# EAGLE board LED Driver (EAGLE 8.6.3)
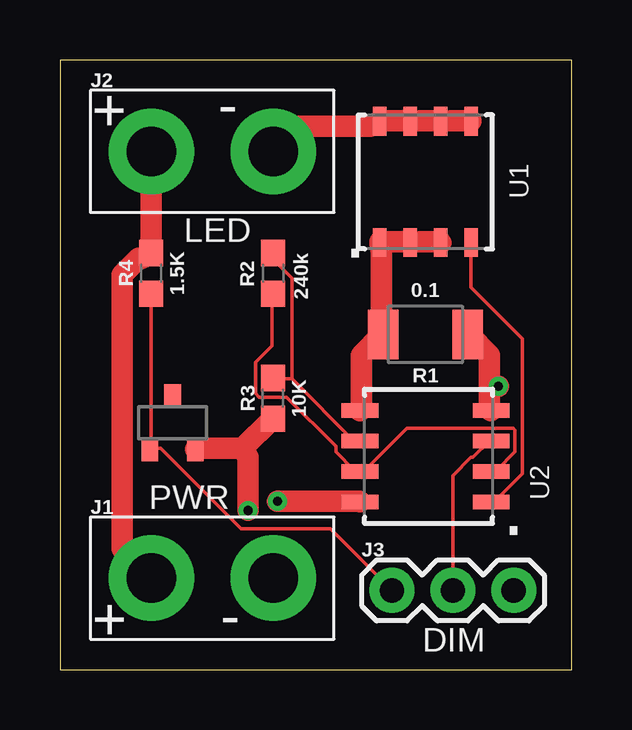
[diagram p0: board, top side]
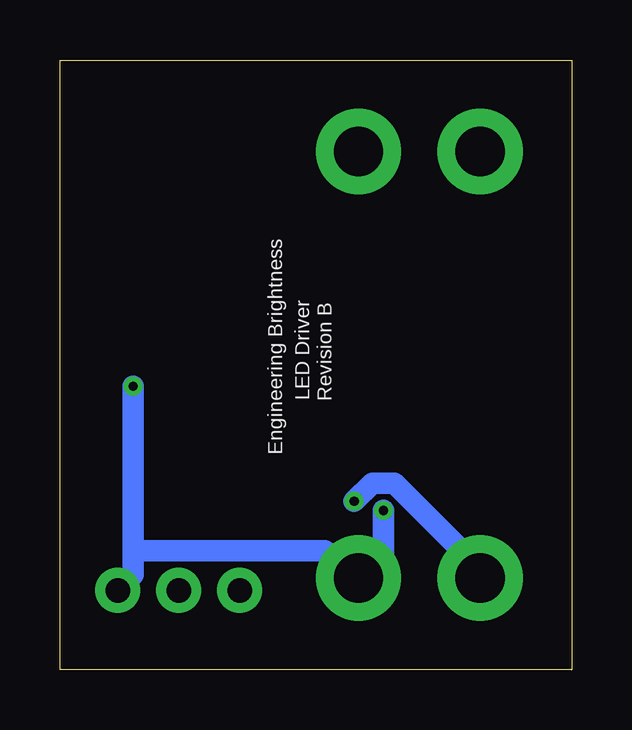
[diagram p1: board, bottom side, seen from below]

Size 21.34 x 25.4 mm. Coordinates in mm from the lower left corner, seen from the top.
Outline: 0,0 21.34,0 21.34,25.4 0,25.4 0,0
Copper layers (1*16): Top 0.035mm / dielectric 1.5mm / Bottom 0.035mm
Design rules "default": minimum track width 6mil, minimum drill 0.35mm, track to track 6mil, track to pad 6mil, pad to pad 6mil, via to via 6mil, smd to smd 6mil, copper to edge 40mil, drill to drill 6mil, minimum pad ring 10mil, minimum via ring 8mil, stop-mask expansion 4mil, vias tented up to drill 0mil, thermal gap 10mil
Net classes: 1 POWER: width 0.889 mm, drill 0.381 mm, clearance 0.203 mm

## Footprints (pad centres in the part's own frame; a part is rotated, then mirrored left to right if it is on the bottom)
DBZ_R-PDSO-G3 = smd 0.7 x 1: 1 -0.95,-1.1; 2 0.95,-1.1; 3 0,1.1
1X02_XTRA_BIG = drill 2.057 pad 3.556: 1 -2.54,0; 2 2.54,0
1X03 = drill 1.016 pad 1.88: 1 0,0; 2 2.54,0; 3 5.08,0
1210 = smd 1.27 x 2.06: 1 -1.755,0; 2 1.755,0
0603 = smd 1.1 x 1: 1 -0.85,0; 2 0.85,0
SO8 = smd 1.194 x 0.559: 1 -2.527,1.905; 2 -2.527,0.635; 3 -2.527,-0.635; 4 -2.527,-1.905; 5 2.527,-1.905; 6 2.527,-0.635; 7 2.527,0.635; 8 2.527,1.905
SOIC8 = smd 0.61 x 1.524: 1 -1.905,-2.731; 2 -0.635,-2.731; 3 0.635,-2.731; 4 1.905,-2.731; 5 1.905,2.731; 6 0.635,2.731; 7 -0.635,2.731; 8 -1.905,2.731

## Placement (x,y rotation side)
IC1  LM4041A12DBZ  [DBZ_R-PDSO-G3]  4.7,10.29 0 top
J1  [1X02_XTRA_BIG]  6.35,3.81 0 top
J2  [1X02_XTRA_BIG]  6.35,21.59 0 top
J3  [1X03]  13.84,3.3 0 top
R1  0.1  [1210]  15.24,13.97 180 top
R2  240k  [0603]  8.89,16.51 270 top
R3  10K  [0603]  8.89,11.3 90 top
R4  1.5K  [0603]  3.81,16.51 90 top
U$1  SI4712DY  [SO8]  15.24,20.32 90 top
U$2  MC33202DR2G  [SOIC8]  15.24,8.89 90 top

## Library data of the parts
IC1 = texas; MPN: LM4041A12IDBZR; OC_FARNELL: 1407949; OC_NEWARK: 58K5875
J1-J3 = SparkFun-Connectors
R1 = SparkFun-Resistors; PROD_ID: RES-12374
R2-R4 = SparkFun-Resistors; PROD_ID: RES-08413
U$1 U$2 = CECFC

## Nets
GND [POWER]: IC1.2 J1.2 J3.3 R1.1 R3.1 U$2.4
N$1: IC1.1 J3.1 R4.1
N$2: J3.2 U$2.3
N$3: U$1.4 U$2.1
N$4 [POWER]: J2.2 U$1.5 U$1.6 U$1.7 U$1.8
N$5 [POWER]: R1.2 U$1.1 U$1.2 U$1.3 U$2.5
N$6: R2.2 U$2.2 U$2.7
N$7: R2.1 R3.2 U$2.6
VCC [POWER]: J1.1 J2.1 R4.2 U$2.8

## Tracks (layer width: path | path; a pad name or v marks a point on that pad's centre or on a via)
GND  (via drill 0.38)
  Top 0.889: 17.91,11.81 17.91,13.11 17.07,13.95 R1.1 | 17.91,11.81 17.91,10.82 U$2.4 | v18.29,11.81 17.91,11.81 | 7.62,9.22 5.71,9.22 IC1.2 | 7.62,9.22 8.84,10.44 R3.1 | v7.85,6.63 7.85,8.84 7.62,9.22
  Bottom 0.889: 18.29,4.95 18.29,3.96 18.9,3.35 J3.3 | 18.29,4.95 v18.29,11.81 | v7.85,6.63 7.85,4.8 8.84,3.81 J1.2 9.3,3.96 10.29,4.95 18.29,4.95
N$1
  Top 0.152: R4.1 3.81,9.22 IC1.1 3.89,9.22 4.19,9.22 7.54,5.87 11.28,5.87 J3.1
N$2
  Top 0.152: J3.2 16.38,8.08 17.14,8.84 17.22,8.84 17.91,9.53 U$2.3
N$3
  Top 0.152: U$1.4 17.14,15.93 19.28,13.79 19.28,8.15 18.14,7.01 17.98,7.01 U$2.1
N$4
  Top 0.889: U$1.8 14.55,22.86 U$1.7 15.01,22.86 15.85,22.86 U$1.6 16.31,22.86 U$1.5 | U$1.8 | U$1.8 12.95,22.63 9.91,22.63 8.91,21.64 J2.2
N$5
  Top 0.889: U$1.3 15.85,17.83 15.01,17.83 U$1.2 14.55,17.83 13.34,17.83 U$1.1 13.41,17.37 13.41,14.4 R1.2 13.41,13.95 12.57,13.11 12.57,10.82 U$2.5
N$6
  Top 0.152: R2.2 8.84,15.62 8.84,13.49 8.15,12.8 8.15,11.51 8.31,11.35 9.45,11.35 11.51,9.3 11.51,9.07 12.27,8.31 12.5,8.31 U$2.7 12.57,8.31 12.72,8.31 14.48,10.06 18.9,10.06 18.97,9.98 18.97,9.07 18.21,8.31 17.98,8.31 U$2.2
N$7
  Top 0.152: 9.68,12.12 8.91,12.12 R3.2 | 9.68,12.12 12.27,9.53 U$2.6 | 9.68,12.12 9.68,16.31 8.91,17.07 8.91,17.3 R2.1
VCC  (via drill 0.38)
  Top 0.889: J2.1 R4.2 3.43,17.14 3.28,17.14 2.59,16.46 2.59,5.03 J1.1 | v9.07,7.01 12.5,7.01 U$2.8
  Bottom 0.889: v9.07,7.01 8.31,7.77 7.39,7.77 3.81,4.19 J1.1

## Text on the board
tPlace: . | .
bPlace: Engineering Brightness | Revision B | LED Driver
tNames: - | + | U1 | LED | U2 | PWR | + | - | DIM